# Altium PCB PCB1.PcbDoc
Units mil, origin at the board's own origin, x right, y up, seen from the top; angles counter-clockwise.
Board outline 6000 x 4000 mil, 2 copper layers (Top Layer, Bottom Layer); 8 components, 3 nets, 90 pads, 0 vias.
Unrouted connection lines stored in the file: 4.
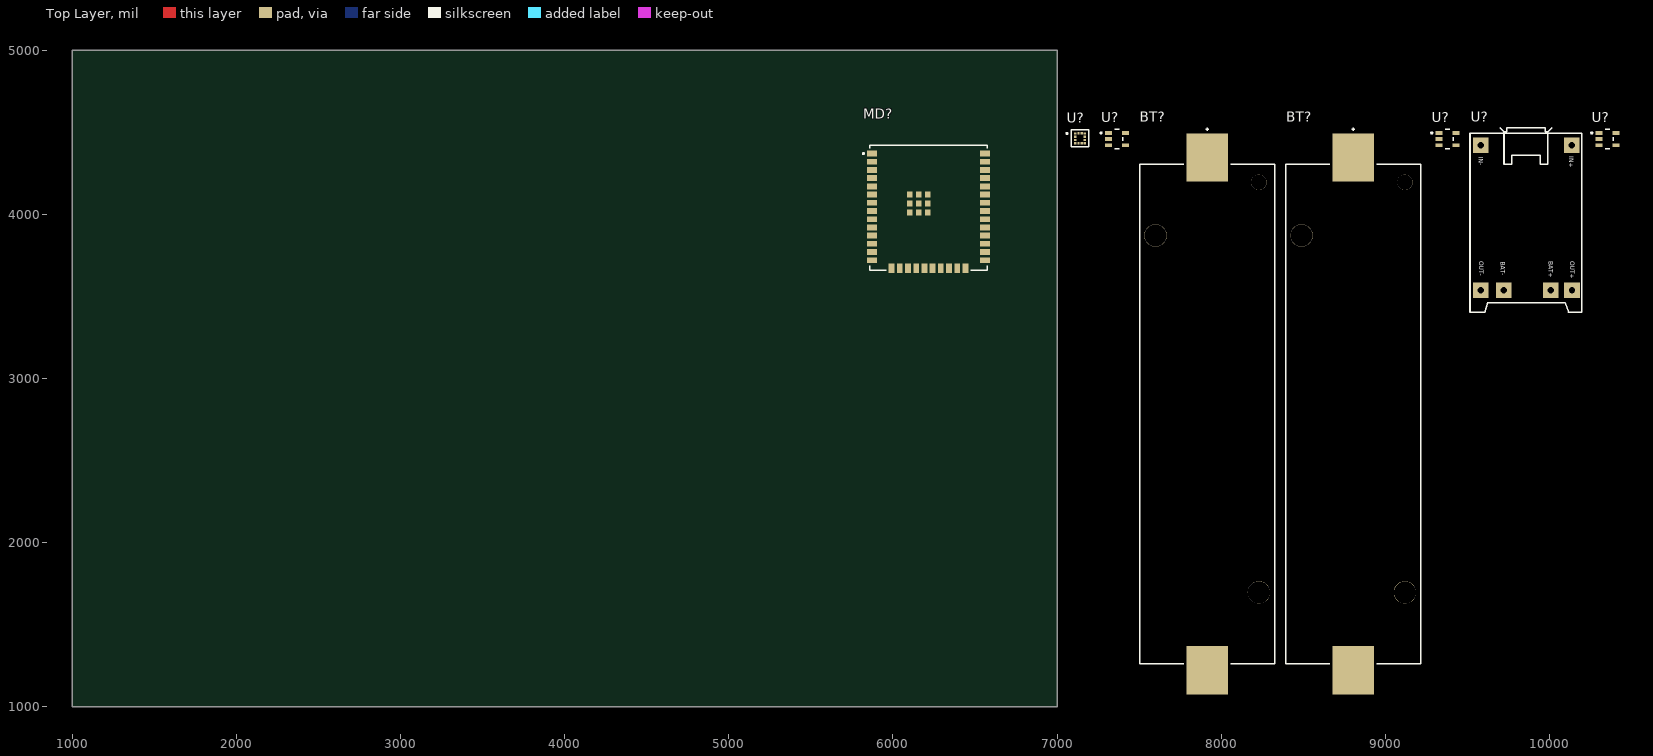
[diagram p0: Top Layer view]
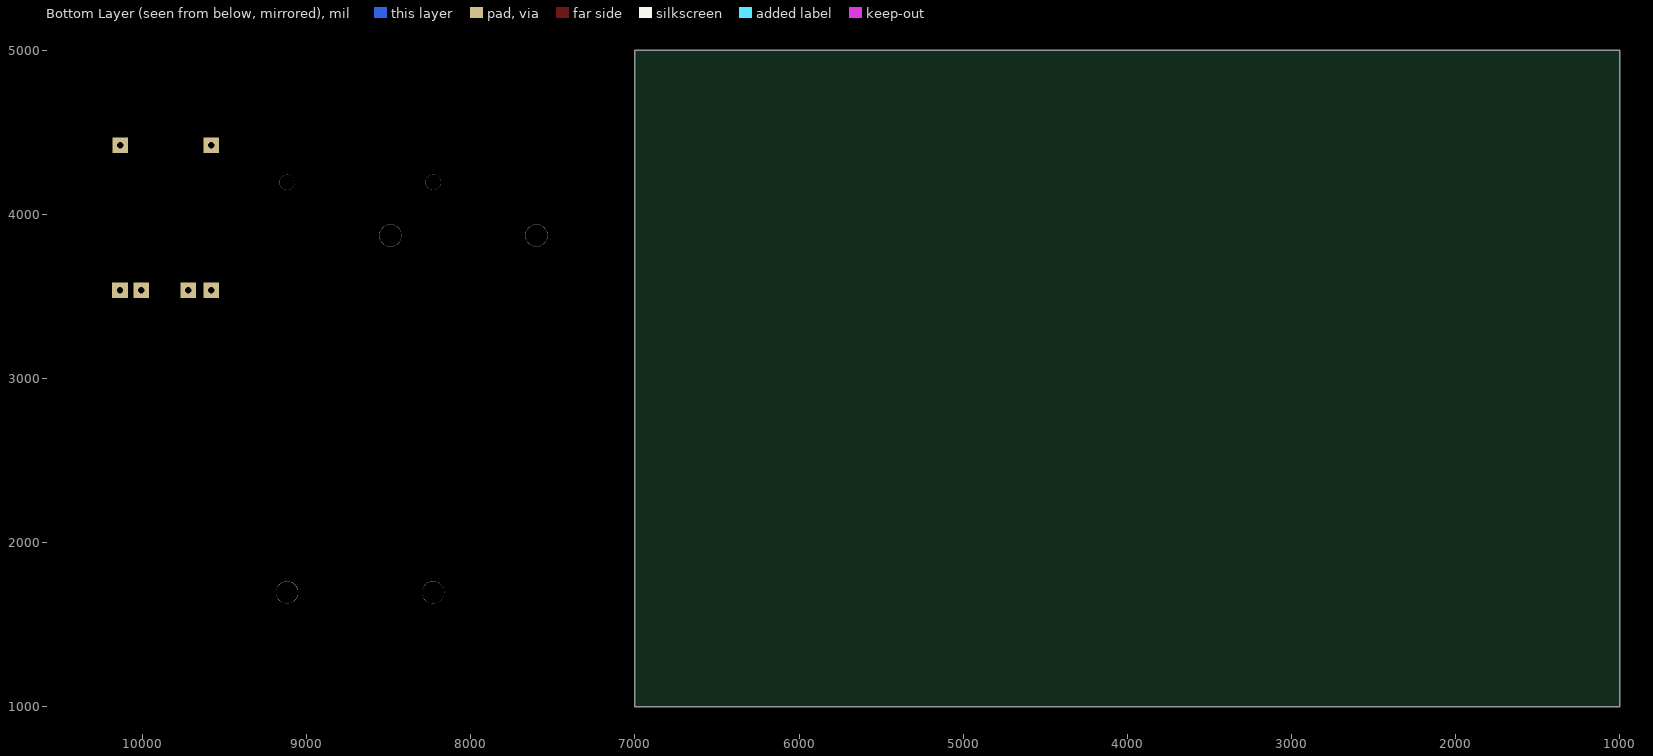
[diagram p1: Bottom Layer view, seen from below]

## Layer stack, top to bottom
Top Solder: solder mask 0.4, Solder Resist, Dk 3.5
Top Layer: signal copper 1.4
Dielectric 1: dielectric 12.6, FR-4, Dk 4.8
Bottom Layer: signal copper 1.4
Bottom Solder: solder mask 0.4, Solder Resist, Dk 3.5

## Board outline
1000,1000 7000,1000 7000,5000 1000,5000

## Design rules (kind name [scope] priority, off if disabled: settings)
Clearance [All] p1: gap=10 ignorepadtopadclearanceinfootprint=FALSE
PolygonConnect [All] p1: connectstyle=Relief reliefconductorwidth=10 reliefentries=4 polygonreliefangle="90 Angle" airgapwidth=10
RoutingVias [All] p1: holewidth=28 width=50 viastyle="Through Hole" minholewidth=28 minwidth=50 maxholewidth=28 maxwidth=50
SolderMaskExpansion [All] p1: expansion=4 istentingtop=FALSE
SupplyNets "Schematic Supply Nets_1" [InNet('3.3V')] p1: voltage=0.000
SupplyNets "Schematic Supply Nets" [InNet('GND')] p2: voltage=0.000
Width [All] p1: maxlimit=10 minlimit=10 preferedwidth=10
30 further rules are at their usual default settings.

## Classes and differential pairs
component class Main: BT? MD? U?

## Components (designator, comment, footprint, x,y, rotation, side; value= is the part's Value field where it differs from the comment)
BT? "18650" FP-1042P-MFG 7915,2785 r90 top
BT? "18650" FP-1042P-MFG 8805,2785 r90 top
MD? "ESP32-WROOM-32U (16MB)" FP-ESP32-WROOM-32U_16MB-MFG 6216.61,4040.94 r0 top
U? "TLV74333PDBVR" FP-DBV0005A-MFG 7365,4460 r0 top
U? "TLV74333PDBVR" FP-DBV0005A-MFG 9380,4460 r0 top
U? "TLV74333PDBVR" FP-DBV0005A-MFG 10355,4460 r0 top
U? "TP4056_6PINS" TP4056_6PINs 9860,3980 r0 top
U? "LIS2DH12TR" FP-LGA-12-8365767-MFG 7140,4465 r0 top

## Footprints (in the part's own frame and the unit in brackets; to place one, negate y for a bottom-side part, rotate by r counter-clockwise, add the part's x,y. Pads: shape width x height; smd on the part's side, far side on the other; paste and mask are expansions set on the pad)
FP-1042P-MFG [mil]
  rect 294x255 smd paste+0 mask+0: 1(-1562.5,0) 2(1562.5,0)
  round 135.83 hole 135.83 unplated paste-99999 mask+0: ""(-1087.5,-315) ""(1087.5,315)
  round 94 hole 94 unplated paste-99999 mask+0: ""(1411.5,-315)
  silkscreen extent -1522,-412 1745,412, body extent -1713,-415 1713,415, height 10
FP-DBV0005A-MFG [mm]
  rrect17% 1.1x0.6 smd paste+0 mask+0: 1(-1.3,0.95) 2(-1.3,0) 3(-1.3,-0.95) 4(1.3,-0.95) 5(1.3,0.95)
  silkscreen extent -2.57,-1.53 0.87,1.53, body extent -1.95,-1.78 1.95,1.78, height 0.25
FP-ESP32-WROOM-32U_16MB-MFG [mm]
  rect 1.5x0.9 smd paste+0 mask+0: 1(-8.75,8.41) 2(-8.75,7.14) 3(-8.75,5.87) 4(-8.75,4.6) 5(-8.75,3.33) 6(-8.75,2.06) 7(-8.75,0.79) 8(-8.75,-0.48) 9(-8.75,-1.75) 10(-8.75,-3.02) 11(-8.75,-4.29) 12(-8.75,-5.56) 13(-8.75,-6.83) 14(-8.75,-8.1) 25(8.75,-8.1) 26(8.75,-6.83) 27(8.75,-5.56) 28(8.75,-4.29) 29(8.75,-3.02) 30(8.75,-1.75) 31(8.75,-0.48) 32(8.75,0.79) 33(8.75,2.06) 34(8.75,3.33) 35(8.75,4.6) 36(8.75,5.87) 37(8.75,7.14) 38(8.75,8.41)
  rect 0.9x1.5 smd paste+0 mask+0: 15(-5.71,-9.35) 16(-4.44,-9.35) 17(-3.17,-9.35) 18(-1.9,-9.35) 19(-0.63,-9.35) 20(0.64,-9.35) 21(1.91,-9.35) 22(3.18,-9.35) 23(4.45,-9.35) 24(5.72,-9.35)
  rect 0.9x0.9 smd paste+0 mask+0: 39(-2.9,-0.71) 39(-2.9,0.69) 39(-2.9,2.09) 39(-1.5,-0.71) 39(-1.5,0.69) 39(-1.5,2.09) 39(-0.1,-0.71) 39(-0.1,0.69) 39(-0.1,2.09)
  silkscreen extent -10.2,-9.67 9.08,9.67, body extent -9.6,-10.2 9.6,9.77, height 0.25
FP-LGA-12-8365767-MFG [mm]
  rect 0.375x0.35 smd paste-1000 mask+0: 1(-0.763,0.75) 2(-0.763,0.25) 3(-0.763,-0.25) 4(-0.763,-0.75) 7(0.763,-0.75) 8(0.763,-0.25) 9(0.763,0.25) 10(0.763,0.75)
  rect 0.35x0.375 smd paste-1000 mask+0: 5(-0.25,-0.763) 6(0.25,-0.763) 11(0.25,0.763) 12(-0.25,0.763)
  silkscreen extent -2.15,-1.35 1.35,1.35, body extent -1.58,-1.58 1.58,1.58, height 0.25
TP4056_6PINs [mm] "MODULE BATTERY CHARGER 6 PINS"
  rect 2.4x2.4 hole 1: 1(-7.068,-11.229) 2(-3.514,-11.229) 3(3.787,-11.229) 4(7.068,-11.229) 5(7.029,11.229) 6(-7.068,11.229)
  silkscreen extent -8.72,-14.63 8.55,13.96, body extent -8.68,-14.59 8.52,13.96, height 4.22

## Part data
BT? BT?: library part BATTERY-HOLDER-18650, "BATTERY HOLDER 18650 SMD TAB", Max Operating Temperature=145°C, Min Operating Temperature=-50°C, Package Quantity=200, Lead Free="Lead Free", Mount="Surface Mount", Number of Cells=1, Packaging=Tray, Termination=SMD/SMT
MD?: library part CMP-194065-000029-1, "RX TXRX MODULE WIFI U.FL SMD", Case/Package=SMD/SMT, Frequency=2.5GHz, Max Operating Temperature=85°C, Min Operating Temperature=-40°C, Data Rate=150Mbps, Interface=I2C, Memory Size=536KB, Mount="Surface Mount", Packaging="Tape and Reel", Sensitivity=-98dBm
U? U? U?: "IC REG LINEAR 3.3V 300MA SOT23-5", Dropout Voltage=125mV, Manufacturer="Texas Instruments", Max Junction Temp=+125°C, Max Supply Voltage=5.5V, Min Supply Voltage=1.4V, Nominal Supply Current=34uA, Output Current=300mA, Output Voltage=1-3.3V, Package=DBV0005A, Temperature="-40°C to +125°C", Temperature Range Low=-40°C, Accuracy Percentage=1%, Automotive=No, Category=IC, ComponentLink2Description=Datasheet, ComponentLink2URL=http://www.ti.com/lit/ds/symlink/tlv743p.pdf, Device Class L1="Integrated Circuits (ICs)", Device Class L2="Power Management ICs", Device Class L3="Voltage Regulators - Linear", Digikey Description="IC REG LINEAR 3.3V 300MA SOT23-5", Height=1.45mm, Lead Free=Yes, Manufacturer Part Number=TLV74333PDBVR, Mouser Description="300mA Low-Dropout (LDO) Regulator 5-SOT-23 -40 to 125", Number Of Outputs=1, Octopart=https://octopart.com/tlv74333pdbvr-texas+instruments-84791760, Output Type=Fixed, RoHS=TRUE, Standoff Height=0mm, Temperature Range High=+125°C
U?: "MODULE BATTERY CHARGER 6 PINS"
U?: "ACCEL 2-16G I2C/SPI 12LGA", Case/Package=LGA, Max Operating Temperature=85°C, Max Supply Voltage=3.6V, Min Operating Temperature=-40°C, Min Supply Voltage=1.71V, Axis="X, Y, Z", Bandwidth=672Hz, Contact Plating=Gold, Height=1mm, Interface=I2C, Lead Free="Lead Free", Length=2.15mm, Mount="Surface Mount", Number of Pins=12, Output Type=SPI, Packaging="Cut Tape", Radiation Hardening=No, REACH SVHC="No SVHC", Width=2.15mm

## Nets (pads, with @x,y where several pads share a name; then routed paths per layer and width w, separated by ;. In a path a pad name is that pad's centre, name@x,y a point inside that pad or via, vN(x,y) a via of type N, cw(c..) or ccw(c..) an arc to the next point about the centre after c; other vN are vias at no path point)
GND: U?.1@9581.73,3537.92
NetBT?_1: BT?.1 U?.2@9721.66,3537.91
NetBT?_2: BT?.2 U?.3@10009.09,3537.91
pads on no net: BT?. MD?.1 MD?.2 MD?.3 MD?.4 MD?.5 MD?.6 MD?.7 MD?.8 MD?.9 MD?.10 MD?.11 MD?.12 MD?.13 MD?.14 MD?.15 MD?.16 MD?.17 MD?.18 MD?.19 MD?.20 MD?.21 MD?.22 MD?.23 MD?.24 MD?.25 MD?.26 MD?.27 MD?.28 MD?.29 MD?.30 MD?.31 MD?.32 MD?.33 MD?.34 MD?.35 MD?.36 MD?.37 MD?.38 MD?.39 U?.1@7109.98,4494.53 U?.1@7313.82,4497.4 U?.1@9328.82,4497.4 U?.1@10303.82,4497.4 U?.2@7109.98,4474.84 U?.2@7313.82,4460 U?.2@9328.82,4460 U?.2@10303.82,4460 U?.3@7109.98,4455.16 U?.3@7313.82,4422.6 U?.3@9328.82,4422.6 U?.3@10303.82,4422.6 U?.4 U?.5 U?.6 U?.7 U?.8 U?.9 U?.10 U?.11 U?.12

## Text inside footprints (layer, text, board x,y; h text height)
U?: Top Overlay "IN+" at 10121.3,4356.8 h27.56 r270; Top Overlay "OUT+" at 10129.05,3715.07 h27.56 r270; Top Overlay "IN-" at 9570.12,4352.87 h27.56 r270; Top Overlay "OUT-" at 9574.05,3715.07 h27.56 r270; Top Overlay "BAT-" at 9703.28,3712.61 h27.56 r270; Top Overlay "BAT+" at 9995.2,3715.07 h27.56 r270